# EAGLE board board-A (EAGLE 9.6.2)
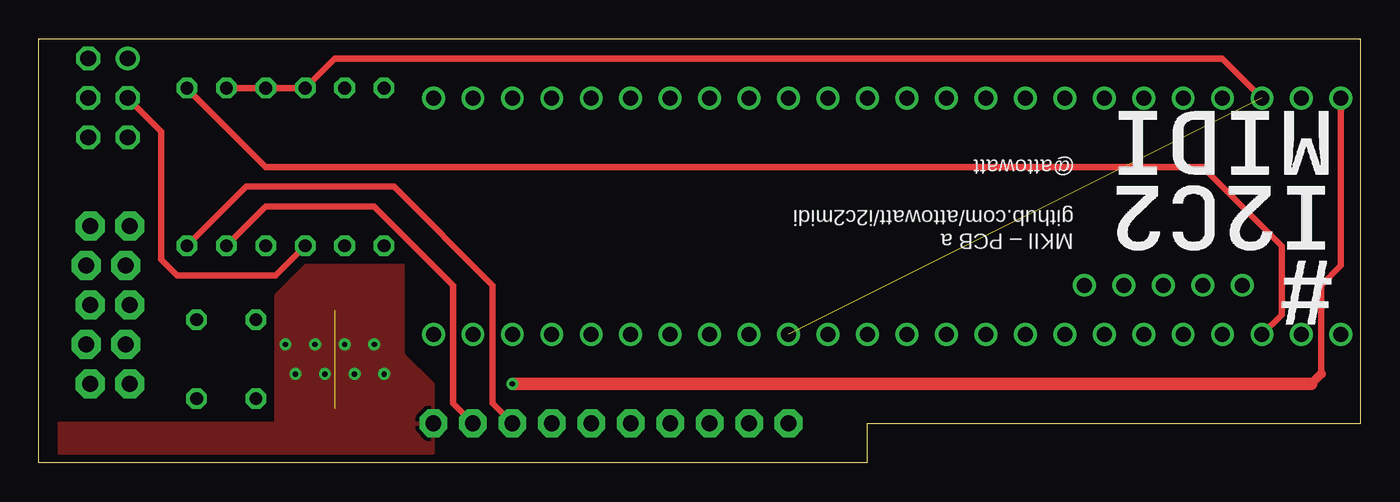
[diagram p0: board, top side]
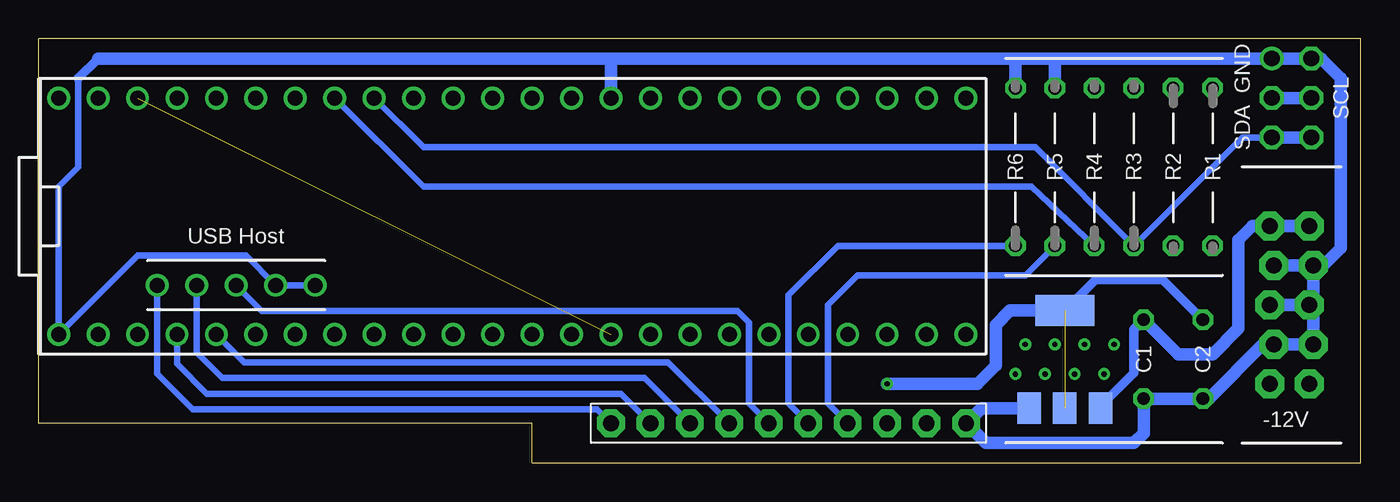
[diagram p1: board, bottom side, seen from below]

Size 85.09 x 27.3 mm. Coordinates in mm from the lower left corner, seen from the top.
Outline: 0,27.3 85.09,27.3 85.09,2.54 53.34,2.54 53.34,0 0,0 0,27.3
Copper layers (1*16): Top 0.035mm / dielectric 1.5mm / Bottom 0.035mm
Design rules "default *": minimum track width 6mil, minimum drill 0.35mm, track to track 6mil, track to pad 6mil, pad to pad 6mil, via to via 6mil, smd to smd 6mil, copper to edge 10mil, drill to drill 6mil, minimum pad ring 10mil, minimum via ring 8mil, stop-mask expansion 4mil, vias tented up to drill 0mil, thermal gap 10mil

## Footprints (pad centres in the part's own frame; a part is rotated, then mirrored left to right if it is on the bottom)
C050-025X075 = drill 0.813 octagon: 1 -2.54,0; 2 2.54,0
MA03-2 = drill 1.016: 1 -2.54,-1.27 | drill 1.016 octagon: 2 -2.54,1.27; 3 0,-1.27; 4 0,1.27; 5 2.54,-1.27; 6 2.54,1.27
SOT223 = smd 1.5 x 2: 1 -2.3,-3.15; 2 0,-3.15; 3 2.3,-3.15 | smd 3.8 x 2: 4 0,3.15
EURO_PWR_HEADER_LOCK = drill 1.016 pad 1.88 octagon: GND1 -2.54,1.143; GND2 -2.54,-1.397; GND3 0,1.397; GND4 0,-1.143; GND5 2.54,1.143; GND6 2.54,-1.397; NEG1 -5.08,1.397; NEG2 -5.08,-1.143; POS1 5.08,1.397; POS2 5.08,-1.143
10MM_RESISTOR = drill 0.813 octagon: 1 -5.08,0; 2 5.08,0
1X10-BIG = drill 1.016 pad 1.778 octagon: 1 -11.43,0; 2 -8.89,0; 3 -6.35,0; 4 -3.81,0; 5 -1.27,0; 6 1.27,0; 7 3.81,0; 8 6.35,0; 9 8.89,0; 10 11.43,0
TEENSY_3.6_ALL_PINS = drill 0.965: 0 -7.62,25.4; 1 -7.62,22.86; 2 -7.62,20.32; 3 -7.62,17.78; 3.3V 7.62,22.86; 3.3V3 -7.62,-7.62; 4 -7.62,15.24; 5 -7.62,12.7; 6 -7.62,10.16; 7 -7.62,7.62; 8 -7.62,5.08; 9 -7.62,2.54; 10 -7.62,0; 11 -7.62,-2.54; 12 -7.62,-5.08; 13 7.62,-5.08; 14/A0 7.62,-2.54; 15/A1 7.62,0; 16/A2 7.62,2.54; 17/A3 7.62,5.08; 18/A4 7.62,7.62; 19/A5 7.62,10.16; 20/A6 7.62,12.7; 21/A7 7.62,15.24; 22/A8 7.62,17.78; 23/A9 7.62,20.32; 24 -7.62,-10.16; 25 -7.62,-12.7; 26 -7.62,-15.24; 27 -7.62,-17.78; 28 -7.62,-20.32; 29 -7.62,-22.86; 30 -7.62,-25.4; 31/A12 -7.62,-27.94; 32/A13 -7.62,-30.48; 33/A14 7.62,-30.48; 34/A15 7.62,-27.94; 35/A16 7.62,-25.4; 36/A17 7.62,-22.86; 37/A18 7.62,-20.32; 38/A19 7.62,-17.78; 39/A20 7.62,-15.24; A21 7.62,-12.7; A22 7.62,-10.16; AGND 7.62,25.4; D+ -4.445,16.51; D- -4.445,19.05; GND -7.62,27.94; GND1 7.62,-7.62; GND3 -4.445,13.97; GND4 -4.445,11.43; VIN 7.62,27.94; VUSB1 -4.445,21.59

## Placement (x,y rotation side)
C1  10 uF  [C050-025X075]  13.97,6.67 270 bottom
C2  10 uF  [C050-025X075]  10.16,6.67 270 bottom
I2C  [MA03-2]  4.45,23.5 270 bottom
IC1  LD117AS50TR  [SOT223]  19.05,6.67 0 bottom
POW  EURO_POWER_HEADERLOCK_PADS  [EURO_PWR_HEADER_LOCK]  4.45,10.16 90 bottom
R1  47  [10MM_RESISTOR]  9.53,19.05 90 bottom
R2  47  [10MM_RESISTOR]  12.06,19.05 90 bottom
R3  2.2k  [10MM_RESISTOR]  14.61,19.05 270 bottom
R4  2.2k  [10MM_RESISTOR]  17.14,19.05 270 bottom
R5  220  [10MM_RESISTOR]  19.68,19.05 270 bottom
R6  220  [10MM_RESISTOR]  22.23,19.05 270 bottom
U$1  PINHD-1X10  [1X10-BIG]  36.83,2.54 0 bottom
U$3  TEENSY_3.6_ALL_PINS  [TEENSY_3.6_ALL_PINS]  55.88,15.88 90 bottom

## Library data of the parts
C1 C2 U$1 = adafruit_jh1
I2C = MusicThingModular; OC_FARNELL: unknown; OC_NEWARK: unknown
IC1 = v-reg_jh
POW = attowatt
R1-R6 = MusicThingModular_jh
U$3 = Teensy_3_and_LC_Series_Boards_v1.4_jh

## Nets
3V3: R2.2 R3.1 R4.1 U$3.3.3V U$3.3.3V3
5V: U$1.1 U$3.VUSB1
+12V: C1.1 IC1.3 POW.POS1 POW.POS2
AGND: U$3.AGND
D+: U$1.5 U$3.D+
D-: U$1.3 U$3.D-
GND: C1.2 C2.2 I2C.1 I2C.2 IC1.1 POW.GND1 POW.GND2 POW.GND3 POW.GND4 POW.GND5 POW.GND6 R5.1 R6.1 U$1.10 U$3.GND U$3.GND1 U$3.GND3 U$3.GND4
LED1: R6.2 U$1.6
LED2: R5.2 U$1.7
PIN2: U$1.2 U$3.2
PIN3: U$1.4 U$3.3
S$16: R1.1 U$1.8
S-MIDI-R: R2.1 U$1.9
SCL: I2C.3 I2C.4 R4.2 U$3.19/A5
SDA: I2C.5 I2C.6 R3.2 U$3.18/A4
TX1: R1.2 U$3.1
VIN: C2.1 IC1.2 IC1.4 U$3.VIN

## Tracks (layer width: path | path; a pad name or v marks a point on that pad's centre or on a via)
3V3  (1 unrouted)
  Top 0.406: U$3.3.3V 76.2,26.04 19.05,26.04 R4.1 R3.1 R2.2
5V
  Bottom 0.406: U$3.VUSB1 77.47,5.71 75.18,3.43 49.15,3.43 U$1.1
+12V
  Bottom 0.61: IC1.3 16.75,3.64 14.61,5.79 14.61,8.57 C1.1
  Bottom 0.813: POW.POS2 POW.POS1 6.99,15.24 7.87,14.35 7.87,8.64 9.53,6.99 11.75,6.99 C1.1
D+
  Bottom 0.406: U$3.D+ 70.74,9.78 40.11,9.78 39.37,9.04 39.37,3.81 U$1.5
D-
  Bottom 0.406: U$3.D- 74.93,7.11 73.28,5.46 46.1,5.46 U$1.3
GND  (via drill 0.35)
  Bottom 0.406: U$3.GND4 U$3.GND3 71.75,13.34 78.74,13.34 U$3.GND 83.82,17.78 82.55,19.05 82.55,24.77
  Bottom 0.61: 81.28,26.04 82.55,24.77
  Bottom 0.813: POW.GND6 2.41,12.7 1.27,13.84 1.27,24.77 2.54,26.04 I2C.2 I2C.1 19.68,26.04 | POW.GND4 3.05,9.91 POW.GND2 POW.GND1 6.29,7.62 9.78,4.13 C2.2 C1.2 13.97,1.91 14.61,1.27 24.13,1.27 U$1.10 24.42,3.52 IC1.1 | POW.GND4 3.05,10.41 POW.GND6 | POW.GND4 POW.GND3 | POW.GND6 POW.GND5 | 19.68,26.04 22.23,26.04 | 22.23,26.04 48.26,26.04 | 48.26,26.04 81.28,26.04 | U$3.GND1 48.26,26.04 | R5.1 19.68,26.04 | R6.1 22.23,26.04
  other vias: 15.88,7.62 16.51,5.71 18.41,5.71 20.32,5.71 22.23,5.71 19.68,7.62 21.59,7.62 17.78,7.62
  pour Top: 23.5,12.7 17.14,12.7 15.24,10.79 15.24,2.54 1.27,2.54 1.27,0.64 25.4,0.64 25.4,5.08 23.5,6.99
LED1
  Bottom 0.406: R6.2 33.66,13.97 36.83,10.79 36.83,3.81 U$1.6
LED2
  Bottom 0.406: R5.2 21.59,12.06 32.38,12.06 34.29,10.16 34.29,3.81 U$1.7
PIN2
  Bottom 0.406: U$3.2 76.2,6.35 74.3,4.45 47.62,4.45 U$1.2
PIN3
  Bottom 0.406: U$1.4 44.58,6.48 71.88,6.48 U$3.3
S$16
  Top 0.406: U$1.8 29.21,3.81 29.21,11.43 22.86,17.78 13.34,17.78 R1.1
S-MIDI-R
  Top 0.406: R2.1 14.61,16.51 21.59,16.51 26.67,11.43 26.67,3.81 U$1.9
SCL
  Top 0.406: I2C.3 7.87,21.34 7.87,13.08 8.89,12.06 15.24,12.06 R4.2
  Bottom 0.406: R4.2 21.19,17.78 60.33,17.78 U$3.19/A5
  Bottom 0.813: I2C.3 I2C.4
SDA
  Bottom 0.406: I2C.5 7.62,20.95 R3.2 20.95,20.32 60.33,20.32 U$3.18/A4
  Bottom 0.813: I2C.5 I2C.6
TX1
  Top 0.406: R1.2 14.61,19.05 74.93,19.05 80.01,13.97 80.01,9.53 U$3.1
VIN  (via drill 0.35)  (1 unrouted)
  Top 0.406: 82.55,5.71 82.55,11.43 83.82,12.7 U$3.VIN
  Top 0.61: 81.92,5.08 82.55,5.71
  Top 0.813: v30.48,5.08 81.92,5.08
  Bottom 0.61: C2.1 12.76,11.81 17.06,11.81 IC1.4
  Bottom 0.813: v30.48,5.08 24.68,5.08 23.5,6.26 23.5,8.89 22.57,9.82 IC1.4

## Text on the board
tPlace: @attowatt | MKII – PCB a / github.com/attowatt/i2c2midi
bPlace: GND | SCL | SDA | USB Host | -12V